# Altium PCB TXPAFV2.PcbDoc
Units mm, origin at the board's own origin, x right, y up, seen from the top; angles counter-clockwise.
Board outline 90.17 x 50.8 mm, 2 copper layers (Top Layer, Bottom Layer); 38 components, 22 nets, 84 pads, 0 vias.
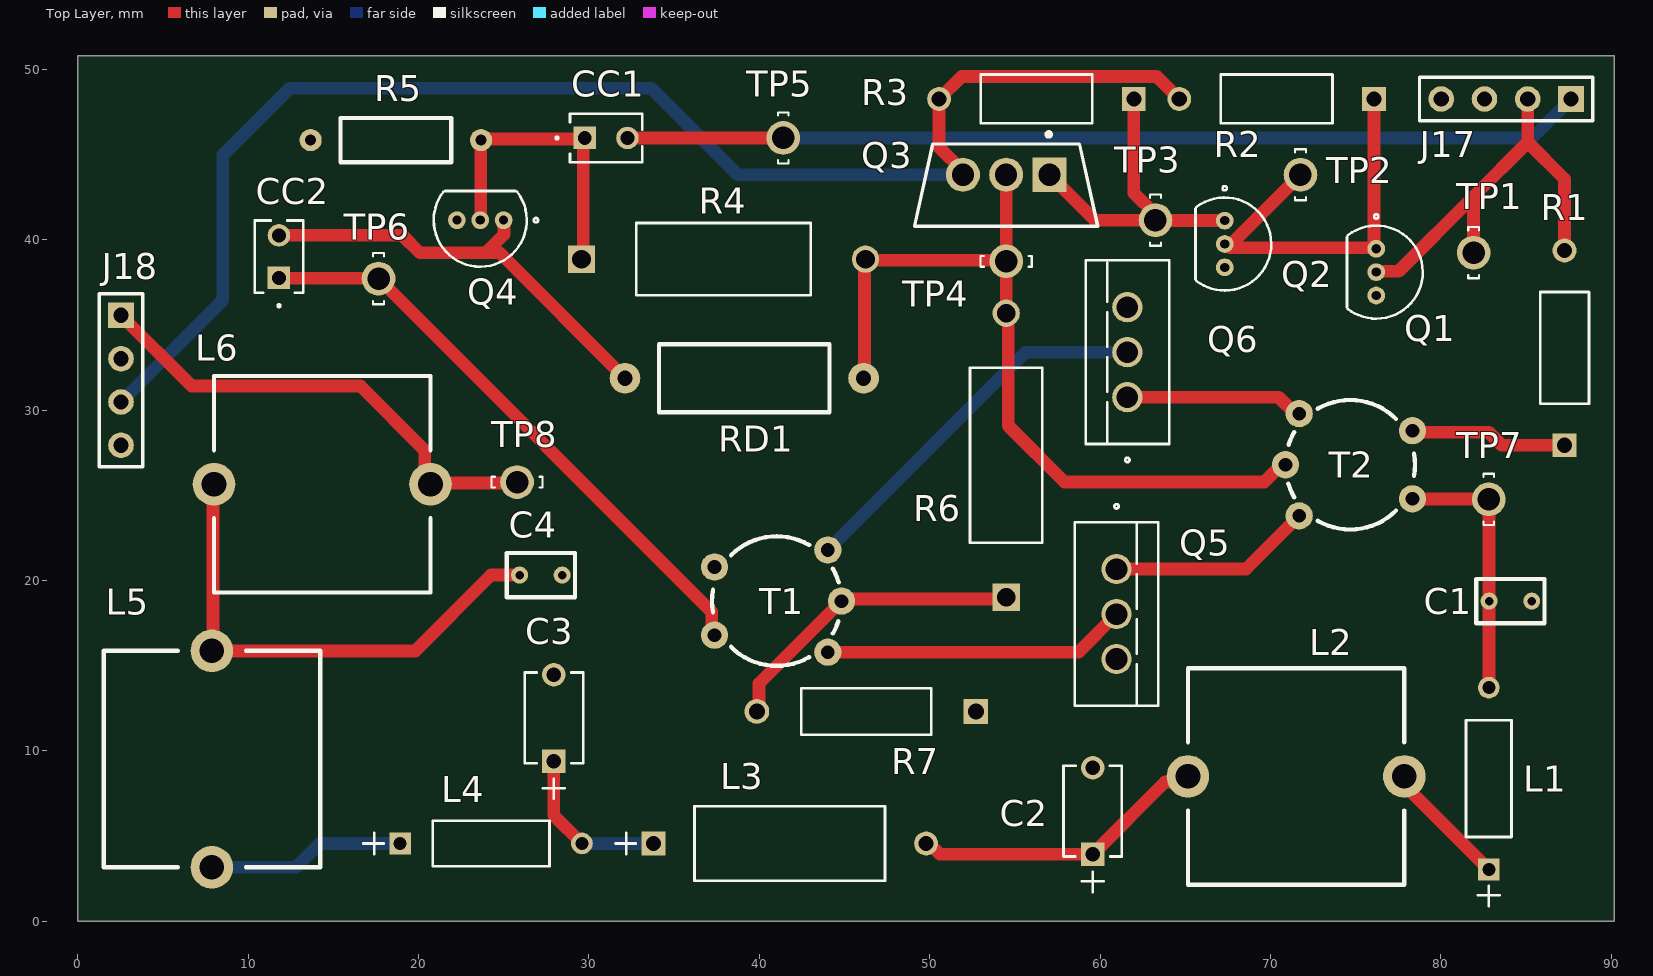
[diagram p0: Top Layer view]
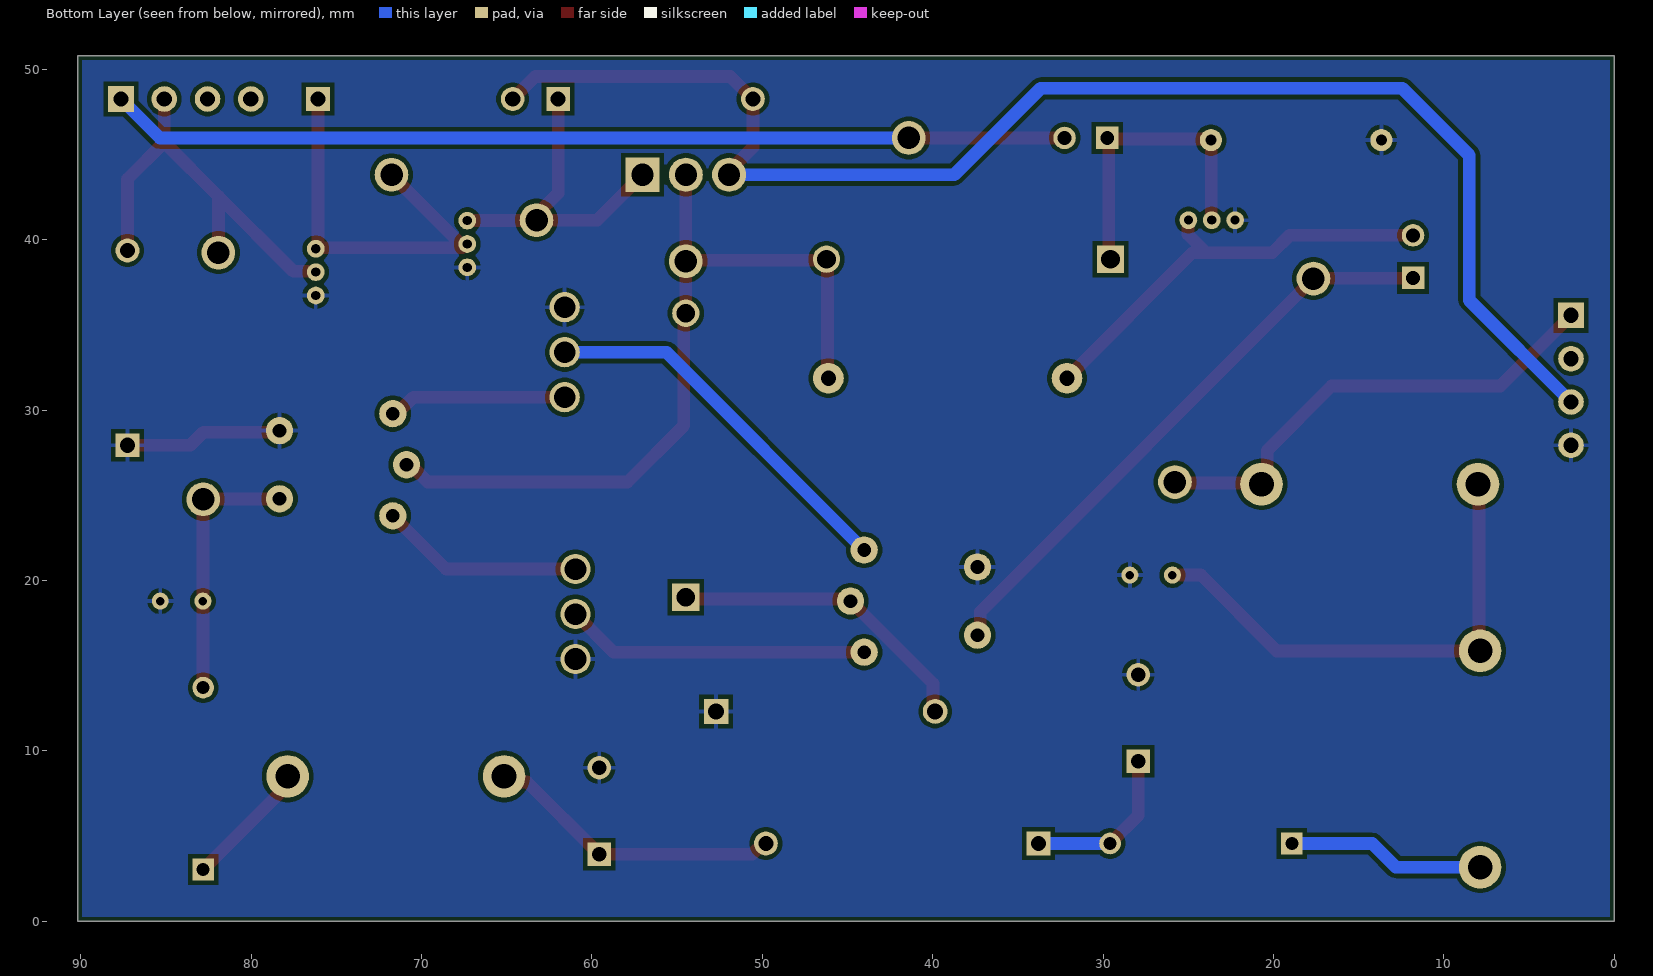
[diagram p1: Bottom Layer view, seen from below]

## Layer stack, top to bottom
Top Solder: solder mask 0.0102, Solder Resist, Dk 3.5
Top Layer: signal copper 0.0356
Dielectric 1: dielectric 0.32, FR-4, Dk 4.8
Bottom Layer: signal copper 0.0356
Bottom Solder: solder mask 0.0102, Solder Resist, Dk 3.5

## Board outline
0,0 90.17,0 90.17,50.8 0,50.8

## Design rules (kind name [scope] priority, off if disabled: settings)
Clearance [All] p1: gap=0.254 ignorepadtopadclearanceinfootprint=FALSE except(0: Arc-Hole Track-Hole SMDPad-Hole THPad-Hole Via-Hole Fill-Hole Poly-Hole Region-Hole Text-Hole)
HoleSize [All] p1: absolutevalues=TRUE maxlimit=22.86 minlimit=0.305 maxpercent=80.000 minpercent=20.000
MinimumSolderMaskSliver [All] p1: minsoldermaskwidth=0.025
PolygonConnect [All] p1: connectstyle=Relief reliefconductorwidth=0.254 reliefentries=4 polygonreliefangle="90 Angle" airgapwidth=0.254
RoutingVias [All] p1: holewidth=0.305 width=0.61 viastyle="Through Hole" minholewidth=0.305 minwidth=0.61 maxholewidth=2.54 maxwidth=5.08
SilkToSilkClearance [All] p1: silktosilkclearance=0
SilkToSolderMaskClearance [IsPad] p1: minsilkscreentomaskgap=0.025 clearancetoexposedcopper=TRUE
SolderMaskExpansion [All] p1: expansion=0.102 istentingtop=FALSE
Width [All] p1: maxlimit=5.08 minlimit=0.254 preferedwidth=0.254
26 further rules are at their usual default settings.

## Components (designator, comment, footprint, x,y, rotation, side; value= is the part's Value field where it differs from the comment)
C1 "Capacitor" K820J15C0GF5TL2 84.074,18.796 r0 top value=82p
C2 "Capacitor" C322C361J5G5TA 59.563,3.937 r90 top value=360p
C3 "Capacitor" C322C361J5G5TA 27.94,9.398 r90 top value=360p
C4 "Capacitor" K820J15C0GF5TL2 27.178,20.32 r0 top value=82p
CC1 "Capacitor" K104K15X7RF5TL2 29.758,45.974 r0 top value=100n
CC2 "Capacitor" K104K15X7RF5TL2 11.811,37.759 r90 top value=100n
J17 "Header 4" HDR1X4 87.63,48.26 r180 top
J18 "Header 4" HDR1X4 2.54,35.56 r270 top
L1 "Inductor" 9230-96-RC 82.804,3.048 r90 top value=120n
L2 "Inductor" 78432010005 71.501,8.509 r0 top value=500n
L3 "Inductor" 9250A-102-RC 33.782,4.572 r0 top value=1u
L4 "Inductor" 9230-96-RC 18.923,4.572 r0 top value=120n
L5 "Inductor" 78432010005 7.874,9.525 r270 top value=500n
L6 "Inductor" 78432010005 14.351,25.654 r180 top value=500n
Q1 "N-chanel Power MOSFET VDMOS Model" BS170 76.2,39.37 r270 top
Q2 "N-chanel Power MOSFET VDMOS Model" BS170 67.31,41.021 r270 top
Q3 "IRF4905PBF" FP-PG-TO220-3-MFG 54.483,43.205 r270 top
Q4 "N-chanel Power MOSFET VDMOS Model" BS170 24.892,41.148 r180 top
Q5 "N-chanel Power MOSFET VDMOS Model" IRF510PBF 60.96,20.674 r270 top
Q6 "N-chanel Power MOSFET VDMOS Model" IRF510PBF 61.595,30.761 r90 top
R1 "Resistor" CF14JT1K00 87.249,27.94 r90 top value=1k
R2 "Resistor" CF14JT1K00 76.073,48.26 r180 top value=1k
R3 "Resistor" CF14JT1K00 61.976,48.26 r180 top value=1k
R4 "Resistor" HVR3700003004FR500 29.566,38.862 r0 top value=3M
R5 "Resistor" MBB0207VD1004BC100 18.669,45.847 r0 top value=1M
R6 "Resistor" HVR3700006984FR500 54.483,19.025 r90 top value=7M
R7 "Resistor" CMF555M0000FKEK 52.705,12.319 r180 top value=5M
RD1 "Resistor" RR02J91RTB 39.116,31.877 r180 top value=91
T1 "Trans CT" CT-Transformer 41.021,18.796 r180 top
T2 "Trans CT" CT-Transformer 74.676,26.797 r0 top
TP1 "4952" 4952 81.915,39.243 r270 top
TP2 "4952" 4952 71.755,43.815 r90 top
TP3 "4952" 4952 63.246,41.148 r90 top
TP4 "4952" 4952 54.483,38.735 r180 top
TP5 "4952" 4952 41.402,45.974 r90 top
TP6 "4952" 4952 17.653,37.719 r270 top
TP7 "4952" 4952 82.804,24.765 r90 top
TP8 "4952" 4952 25.781,25.781 r180 top

## Footprints (in the part's own frame and the unit in brackets; to place one, negate y for a bottom-side part, rotate by r counter-clockwise, add the part's x,y. Pads: shape width x height; smd on the part's side, far side on the other; paste and mask are expansions set on the pad)
4952 [mm] "Test Point"
  round 1.98 hole 1.32: TP(0,0)
  silkscreen extent -1.5,-0.32 1.5,0.32
9230-96-RC [mil]
  rect 50x50 hole 30 mask+0: 1(0,0)
  round 50 hole 30 mask+0: 2(420,0)
  silkscreen extent -85,-52 345,53, body extent -10,-47 430,47, height 95
9250A-102-RC [mil]
  rect 55x55 hole 35 mask+0: 1(0,0)
  round 55 hole 35 mask+0: 2(630,0)
  silkscreen extent -88,-86 535,86, body extent -12,-81 642,81, height 162
78432010005 [mm]
  round 2.5 hole 1.45: 1(-6.35,0) 2(6.35,0)
  silkscreen extent -6.35,-6.35 6.35,6.35
BS170 [mil]
  round 41 hole 21 mask+0: 1(-3.94,0) 2(50,0) 3(103.94,0)
  silkscreen extent -84,-68 158,107
C322C361J5G5TA [mil]
  rect 54x54 hole 34 mask+0: 1(0,0)
  round 54 hole 34 mask+0: 2(200,0)
  silkscreen extent -87,-68 205,68, body extent 0,0 10,10, height 10
CF14JT1K00 [mil]
  rect 55x55 hole 35 mask+0: 1(0,0)
  round 55 hole 35 mask+0: 2(450,0)
  silkscreen extent 96,-56 354,57, body extent -12,-51 462,51, height 103
CMF555M0000FKEK [mil]
  rect 57x57 hole 37 mask+0: 1(0,0)
  round 57 hole 37 mask+0: 2(506,0)
  silkscreen extent 103,-54 403,54, body extent -14,-49 519,49, height 98
CT-Transformer [mm]
  round 1.6 hole 0.8: 1(-3,3) 2(-3.8,0) 3(-3,-3) 4(3.65,2) 5(3.65,-2)
  silkscreen extent -3.63,-3.8 3.8,3.8
FP-PG-TO220-3-MFG [mm]
  rect 2x2 hole 1.3 paste-1000 mask+0: 1(-0.61,2.54)
  round 2 hole 1.3 paste-1000 mask+0: 2(-0.61,0) 3(-0.61,-2.54)
  silkscreen extent -3.1,-5.38 2.41,5.38, body extent -2.51,-5.48 2.51,5.48, height 0.25
HDR1X4 [mm] "Connector; Header; 4 Position"
  rect 1.5x1.5 hole 0.9: 1(0,0)
  round 1.5 hole 0.9: 2(2.54,0) 3(5.08,0) 4(7.62,0)
  silkscreen extent -1.27,-1.27 8.89,1.27
HVR3700003004FR500 [mil]
  rect 63x63 hole 43 mask+0: 1(0,0)
  round 63 hole 43 mask+0: 2(656,0)
  silkscreen extent 126,-84 530,84, body extent -16,-78 673,78, height 157
HVR3700006984FR500 [mil]
  rect 63x63 hole 43 mask+0: 1(0,0)
  round 63 hole 43 mask+0: 2(656,0)
  silkscreen extent 126,-83 530,84, body extent -16,-78 673,78, height 157
IRF510PBF [mil]
  round 70 hole 50 mask+0: 1(0,0) 2(103.94,0) 3(207.87,0)
  silkscreen extent -150,-97 316,97, body extent -104,-91 310,91, height 600
K104K15X7RF5TL2 [mil]
  rect 52x52 hole 32 mask+0: 1(0,0)
  round 52 hole 32 mask+0: 2(98.43,0)
  silkscreen extent -67,-56 133,56, body extent -28,-50 128,52, height 157
K820J15C0GF5TL2 [mm]
  round 1 hole 0.5: 1(-1.25,0) 2(1.25,0)
  silkscreen extent -2,-1.3 2,1.3
MBB0207VD1004BC100 [mm]
  round 1.3 hole 0.65: 1(-5,0) 2(5,0)
  silkscreen extent -3.25,-1.3 3.25,1.3
RR02J91RTB [mm]
  round 1.8 hole 0.9: 1(-7,0) 2(7,0)
  silkscreen extent -5,-2 5,2

## Part data
J17 J18: "Header, 4-Pin", LatestRevisionDate=17-Jul-2002, LatestRevisionNote="Re-released for DXP Platform.", Publisher="Altium Limited"
Q1 Q2 Q4 Q5 Q6: library part "MOSFET N-ch VDMOS", A=1, BV=1e30, CGDMAX=0, CGDMIN=0, CGS=0, CJO=0, EG=1.11, FC=0.5, IBV=1e-10, IS=1e-14, KP=1, KSUBTHRES=0, LAMBDA=0, M=0.5, MTRIODE=1, N=1, NBV=1, NCHAN=1, PHI=0.6, RB=0, RD=0, RDS=1e30, RG=0, RQ=0, RS=0, SimulationGenericComponent=True, SUBSHIFT=0, SUBSLOPE=0, THETA=0, TNOM=27, TT=0, VJ=0.8, VQ=0, VTO=0, XTI=0
Q3: library part CMP-32901-000200-1, "MOSFET P-CH 55V 74A TO-220AB", Case/Package=TO-220, Continuous Drain Current (ID)=74A, Drain to Source Breakdown Voltage=-55V, Drain to Source Resistance=20mR, Gate to Source Voltage (Vgs)=20V, Input Capacitance=3.4nF, Max Operating Temperature=175°C, Max Power Dissipation=200W, Min Operating Temperature=-55°C, Threshold Voltage=-4V, Drain to Source Voltage (Vdss)=-55V, Element Configuration=Single, Halogen Free="Halogen Free", Height=0.6inch, Lead Free="Lead Free", Length=0.414inch, Max Dual Supply Voltage=-55V, Mount="Through Hole", Number of Pins=3, Packaging=Rail/Tube, Power Dissipation=200W, Rds On Max=20mR, REACH SVHC="No SVHC", RoHS Compliant=Yes, Turn-Off Delay Time=61ns, Turn-On Delay Time=18ns, Width=0.185inch
T1 T2: library part "Centre-tapped transformer wound on a binocular core", "Center-Tapped Transformer (Coupled Inductor Model)", LatestRevisionDate=17-Jul-2002, LatestRevisionNote="Re-released for DXP Platform.", Published=8-Jun-2000, Publisher="Altium Limited"
TP1 TP2 TP3 TP4 TP5 TP6 TP7 TP8: Package=None, Availability=Unavailable, MP=4952, Price=None
C1 C2 C3 C4 CC1 CC2 L1 L2 L3 L4 L5 L6: SimulationGenericComponent=True
R1 R2 R3 R4 R5 R6 R7 RD1: SimulationGenericComponent=True, TC1=0, TC2=0

## Nets (pads, with @x,y where several pads share a name; then routed paths per layer and width w, separated by ;. In a path a pad name is that pad's centre, name@x,y a point inside that pad or via, vN(x,y) a via of type N, cw(c..) or ccw(c..) an arc to the next point about the centre after c; other vN are vias at no path point)
"+12-18V POWER": Q3.2 R4.2 R6.2 RD1.1 T2.2 TP4.TP | length 48.2
  Top Layer w0.75: RD1.1 46.172,31.933 46.172,38.806 R4.2 46.291,38.798 54.419,38.798 TP4.TP ; Q3.2 TP4.TP ; T2.2 70.646,26.797 69.63,25.781 57.912,25.781 54.61,29.083 54.61,35.56 R6.2 TP4.TP
"AMPLIFIER OUTPUT": C1.1 L1.2 T2.5 TP7.TP | length 15.6
  Top Layer w0.75: T2.5 78.342,24.781 82.788,24.781 TP7.TP 82.814,24.755 82.814,18.806 C1.1 82.814,18.786 82.814,13.726 L1.2
GROUND: C1.2 C2.2 C3.2 C4.2 J18.4 Q1.3 Q2.3 Q4.3 Q5.3 Q6.3 R1.1 R5.1 R7.1 T1.5 T2.4 | length 9.3
  Top Layer w0.75: T2.4 78.421,28.702 82.804,28.702 83.566,27.94 R1.1
"INPUT SIGNAL": CC1.2 J17.1 TP5.TP | length 56.3
  Top Layer w0.75: CC1.2 TP5.TP
  Bottom Layer w0.75: TP5.TP 85.344,45.974 J17.1
NetC2_1: C2.1 L2.1 L3.2 | length 17.5
  Top Layer w0.75: L3.2 49.959,4.572 50.594,3.937 C2.1 63.8,8.174 64.816,8.174 L2.1
NetC3_1: C3.1 L3.1 L4.2 | length 9.7
  Top Layer w0.75: C3.1 27.94,6.223 L4.2
  Bottom Layer w0.75: L4.2 L3.1
NetC4_1: C4.1 L5.1 L6.2 | length 29.7
  Top Layer w0.75: L6.2 7.938,25.59 7.938,15.938 L5.1 19.812,15.875 24.257,20.32 C4.1
NetCC1_1: CC1.1 Q4.2 R4.1 R5.2 | length 18
  Top Layer w0.75: Q4.2 23.646,41.172 23.646,45.823 R5.2 23.733,45.91 CC1.1@29.694,45.91 ; R4.1 29.662,38.958 29.662,45.878 CC1.1@29.694,45.91 ; CC1.1 CC1.1@29.694,45.91
NetCC2_1: CC2.1 T1.4 TP6.TP | length 34.9
  Top Layer w0.75: CC2.1 11.831,37.739 TP6.TP@17.633,37.739 ; TP6.TP 37.208,18.164 37.208,16.959 T1.4
NetCC2_2: CC2.2 Q4.1 RD1.2 | length 26.1
  Top Layer w0.75: CC2.2 19.05,40.259 20.066,39.243 23.953,39.243 ; Q4.1 25.011,41.129 25.011,40.301 23.953,39.243 ; RD1.2 24.75,39.243 23.953,39.243
NetJ17_2: J17.2 Q1.2 R1.2 TP1.TP | length 25.1
  Top Layer w0.75: Q1.2 76.256,38.156 77.526,38.156 81.915,42.545 ; TP1.TP 81.915,42.545 ; J17.2 85.09,45.72 ; R1.2 87.249,43.561 85.09,45.72 ; 81.915,42.545 85.09,45.72
NetJ18_3: J18.3 Q3.3 R2.2 R3.2 | length 84.3
  Top Layer w0.75: Q3.3 51.943,44.026 50.546,45.423 R3.2 51.874,49.588 63.315,49.588 R2.2
  Bottom Layer w0.75: J18.3 8.509,36.449 8.509,44.958 12.446,48.895 33.655,48.895 38.735,43.815 Q3.3
NetL1_1: L1.1 L2.2 | length 8
  Top Layer w0.254: L2.2@77.851,8.001 L2.2
  Top Layer w0.75: L2.2 78.186,8.174 78.186,7.666 L1.1
NetL4_1: L4.1 L5.2 | length 11.6
  Bottom Layer w0.75: L5.2 12.807,3.175 14.204,4.572 L4.1
NetQ1_1: Q1.1 Q2.2 R2.1 TP2.TP | length 23.3
  Top Layer w0.75: Q2.2 67.389,39.751 67.614,39.526 76.144,39.526 Q1.1 ; Q2.2@67.747,39.807 TP2.TP ; Q1.1@76.073,39.676 R2.1
NetQ2_1: Q2.1 Q3.1 R3.1 TP3.TP | length 19.2
  Top Layer w0.75: Q3.1 59.69,41.148 TP3.TP ; R3.1@62.103,48.387 R3.1 61.976,42.751 63.246,41.481 TP3.TP ; Q2.1 67.296,41.134 63.26,41.134 TP3.TP
NetQ5_1: Q5.1 T2.3 | length 12
  Top Layer w0.75: Q5.1 68.553,20.674 T2.3
NetQ5_2: Q5.2 T1.1 | length 17.9
  Top Layer w0.75: T1.1 58.722,15.796 Q5.2
NetQ6_1: Q6.1 T2.1 | length 10.5
  Top Layer w0.75: Q6.1 70.482,30.761 71.446,29.797 T2.1
NetQ6_2: Q6.2 T1.3 | length 22.4
  Bottom Layer w0.75: T1.3 55.626,33.401 Q6.2
NetR6_1: R6.1 R7.2 T1.2 | length 18.3
  Top Layer w0.75: R7.2 39.986,12.453 39.986,13.961 T1.2 44.935,18.91 54.369,18.91 R6.1
"OUTPUT SIGNAL": J18.1 L6.1 TP8.TP | length 28.4
  Top Layer w0.75: J18.1 6.687,31.413 16.594,31.413 20.366,27.64 20.366,25.989 L6.1 20.764,25.717 25.717,25.717 TP8.TP
pads on no net: J17.3 J17.4 J18.2

## Polygon pours and split planes (outlines as drawn)
GROUND on Bottom Layer "GROUND_L02_P000" (solid, pour order 0): 90.17,0 90.17,50.8 0,50.8 0,0 50.8,0 0,0 50.8,0

## Silkscreen, mask and mechanical layers (free items; w line width, h text height)
Mechanical 1:
  the board outline again, w0.254

## Text inside footprints (layer, text, board x,y; h text height)
Q5: Mechanical 13 "TAB" at 62.332,18.51 h0.64 r270
Q6: Mechanical 13 "TAB" at 60.223,32.925 h0.64 r90